# Altium PCB isg_eos_control_board_xem3001.PcbDoc
Units mil, origin at the board's own origin, x right, y up, seen from the top; angles counter-clockwise.
Board outline 9600 x 5000 mil, 4 copper layers (Top Layer, MidLayer 1, MidLayer 2, Bottom Layer), stack 23.756 mil thick; 133 components, 162 nets, 804 pads, 0 vias.
Unrouted connection lines stored in the file: 515.
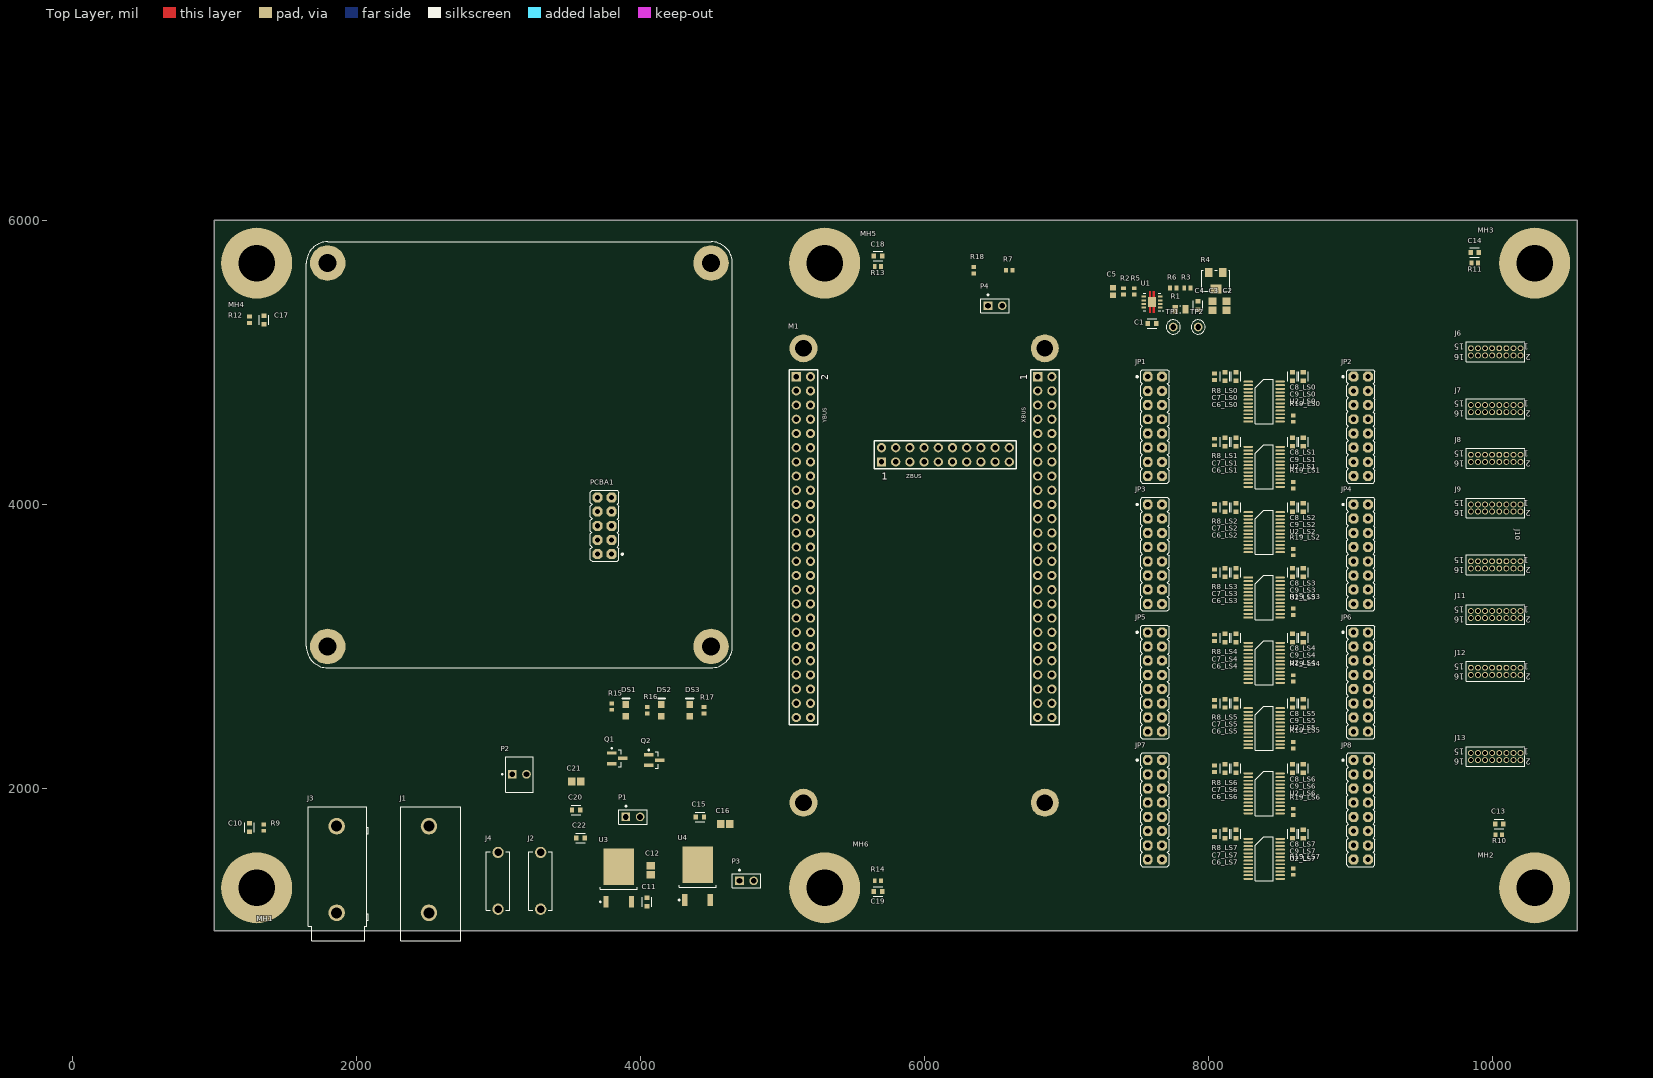
[diagram p0: Top Layer view]
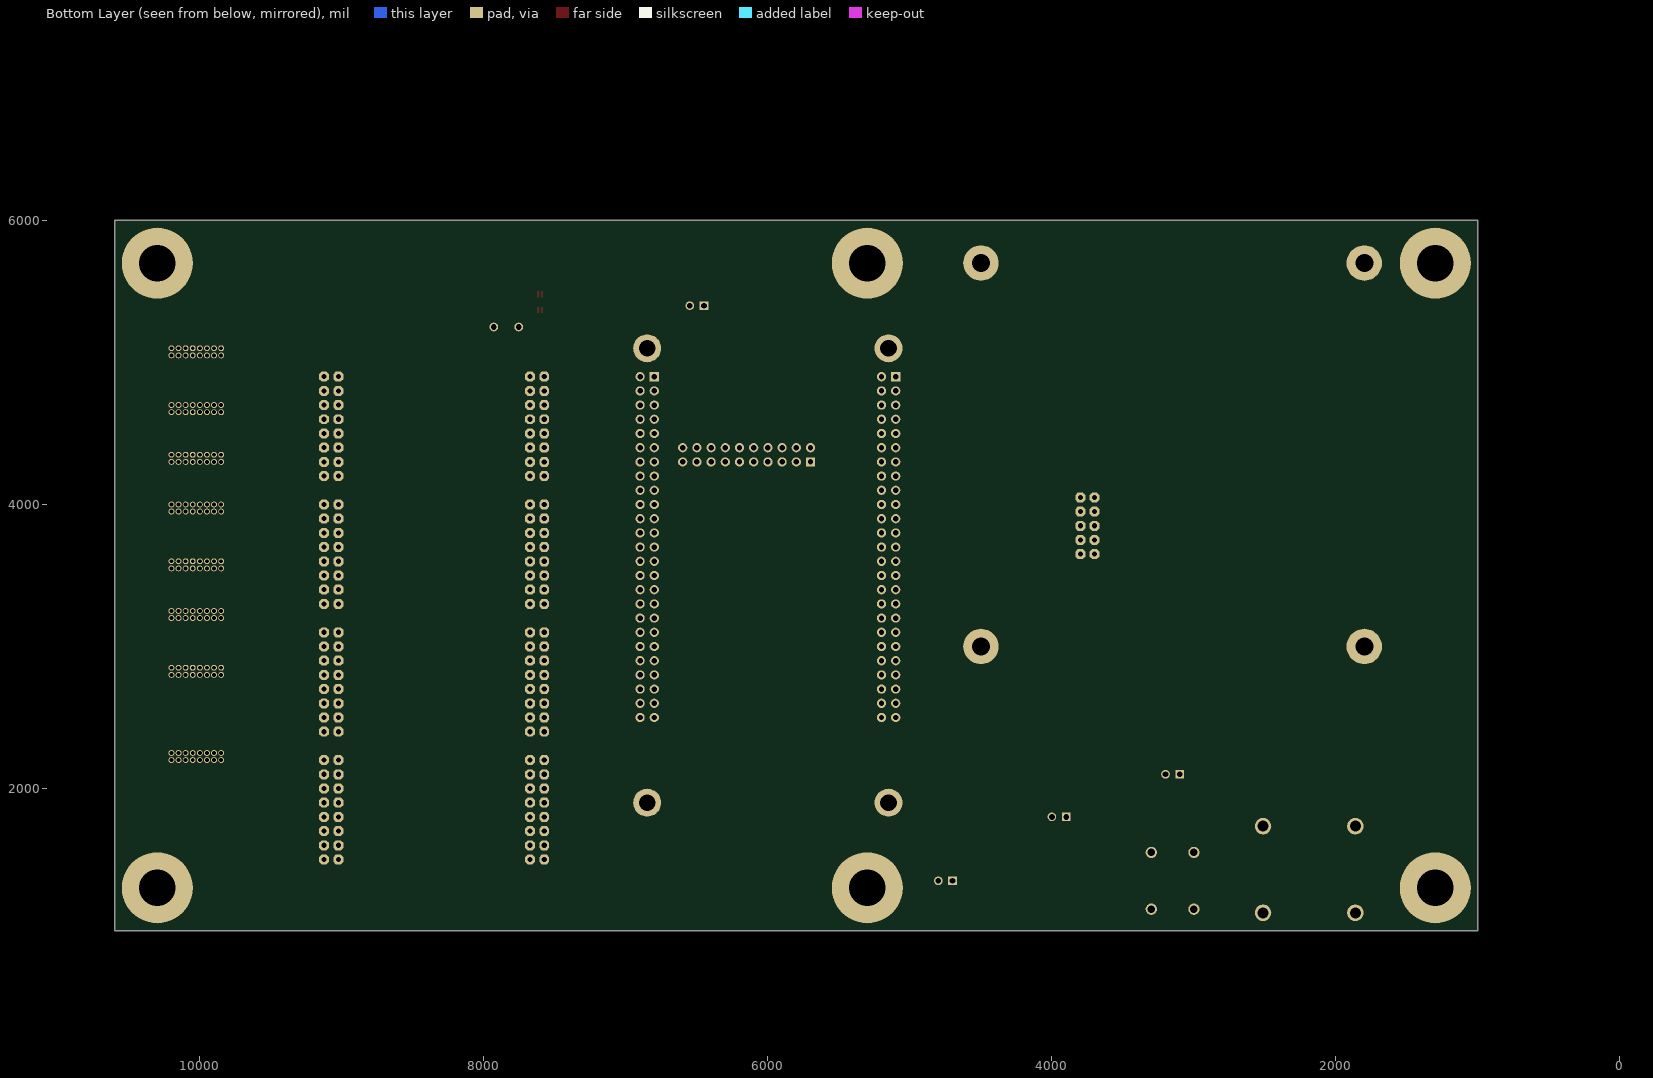
[diagram p1: Bottom Layer view, seen from below]
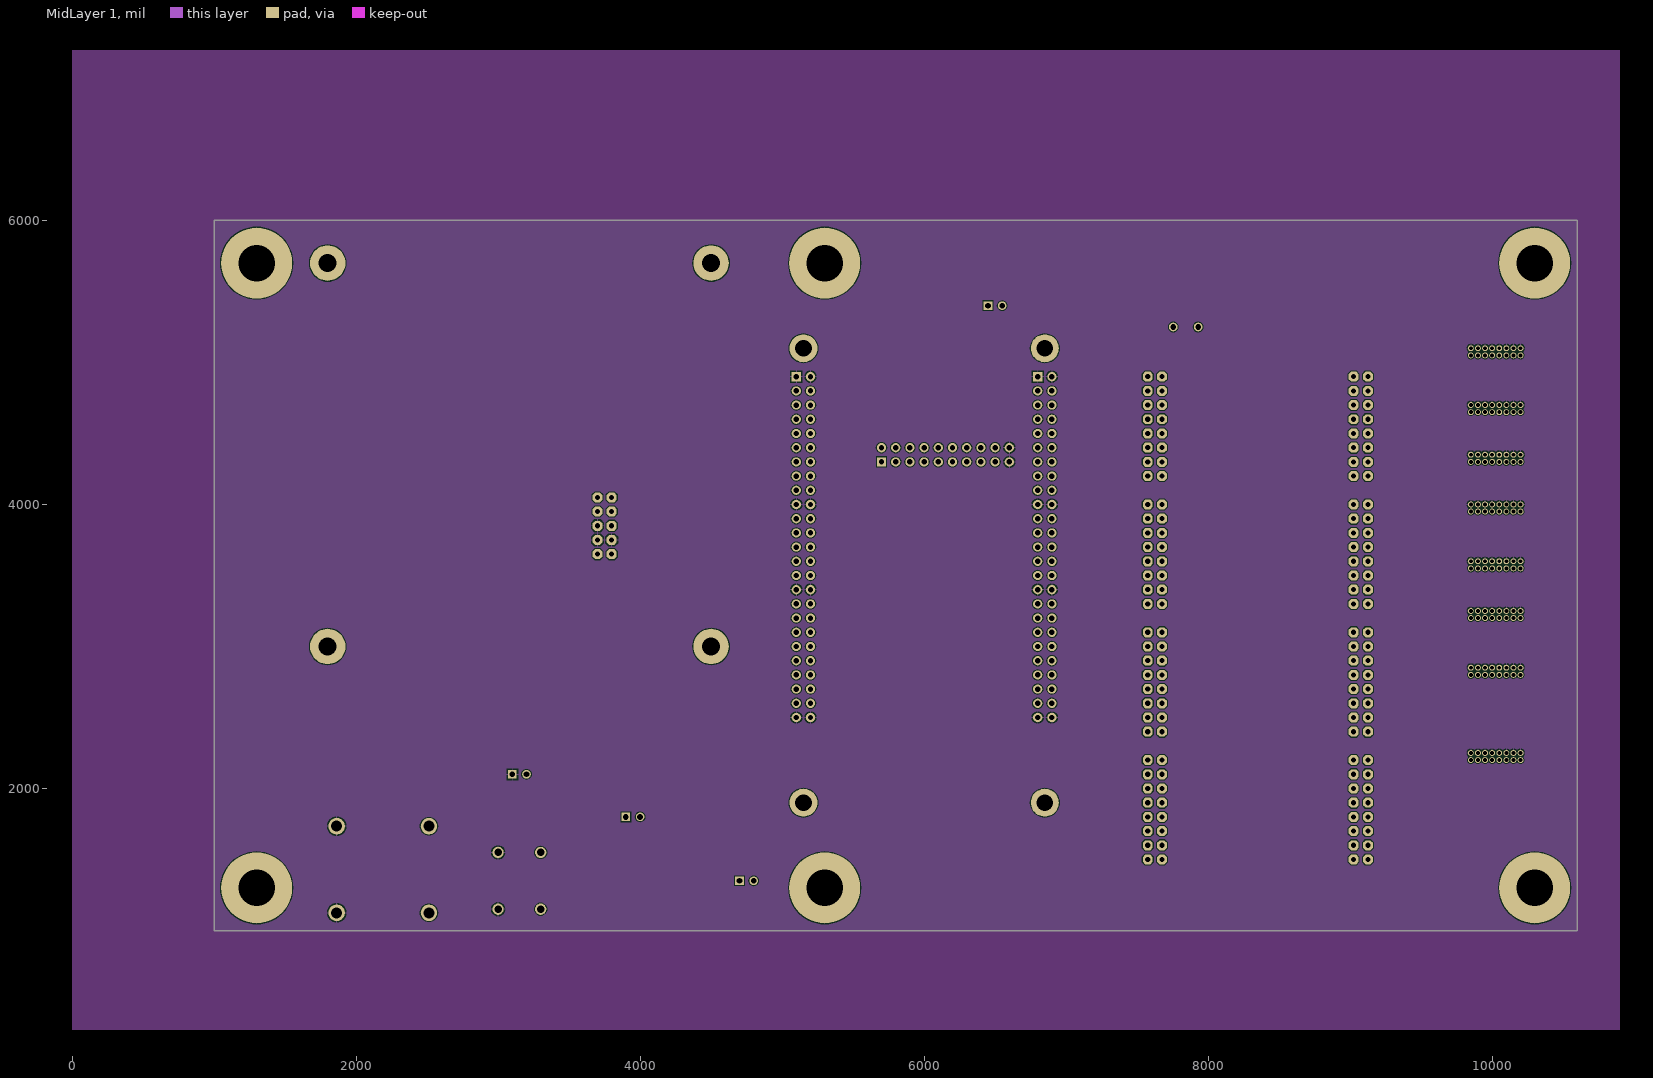
[diagram p2: MidLayer 1]

## Layer stack, top to bottom
Top Solder: solder mask 0.4, Solder Resist, Dk 3.5
Top Layer: signal copper 1.4
Dielectric 2: prepreg 2.8, PP-006, Dk 4.1
MidLayer 1: signal copper 1.3779
Dielectric 1: dielectric 12.6, FR-4, Dk 4.8
MidLayer 2: signal copper 1.3779
Dielectric 3: prepreg 2.8, PP-006, Dk 4.1
Bottom Layer: signal copper 1.4
Bottom Solder: solder mask 0.4, Solder Resist, Dk 3.5

## Board outline
1000,1000 10600,1000 10600,6000 1000,6000

## Design rules (kind name [scope] priority, off if disabled: settings)
Clearance [All] p1: gap=6 ignorepadtopadclearanceinfootprint=FALSE
PolygonConnect [All] p1: connectstyle=Relief reliefconductorwidth=10 reliefentries=4 polygonreliefangle="90 Angle" airgapwidth=10
RoomDefinition LS7 [InComponentClass('LS7')] p1: confinementstyle=ConfineIn formatcopy=TRUE lockcomponents=FALSE outline 8000,1315 8775,1315 8775,1775 8000,1775
RoomDefinition LS6 [InComponentClass('LS6')] p2: confinementstyle=ConfineIn formatcopy=TRUE lockcomponents=FALSE outline 8000,1775 8775,1775 8775,2235 8000,2235
RoomDefinition LS5 [InComponentClass('LS5')] p3: confinementstyle=ConfineIn formatcopy=TRUE lockcomponents=FALSE outline 8000,2235 8775,2235 8775,2695 8000,2695
RoomDefinition LS4 [InComponentClass('LS4')] p4: confinementstyle=ConfineIn formatcopy=TRUE lockcomponents=FALSE outline 8000,2695 8775,2695 8775,3155 8000,3155
RoomDefinition LS3 [InComponentClass('LS3')] p5: confinementstyle=ConfineIn formatcopy=TRUE lockcomponents=FALSE outline 8000,3155 8775,3155 8775,3615 8000,3615
RoomDefinition LS2 [InComponentClass('LS2')] p6: confinementstyle=ConfineIn formatcopy=TRUE lockcomponents=FALSE outline 8000,3615 8775,3615 8775,4075 8000,4075
RoomDefinition LS1 [InComponentClass('LS1')] p7: confinementstyle=ConfineIn formatcopy=TRUE lockcomponents=FALSE outline 8000,4075 8775,4075 8775,4535 8000,4535
RoomDefinition LS0 [InComponentClass('LS0')] p8: confinementstyle=ConfineIn formatcopy=TRUE lockcomponents=FALSE outline 8000,4535 8775,4535 8775,4995 8000,4995
RoomDefinition LDO_DVDD [InComponentClass('LDO_DVDD')] p9: confinementstyle=ConfineIn formatcopy=TRUE lockcomponents=FALSE outline 7279.53,5125 8179.53,5125 8179.53,5685 7279.53,5685
RoutingVias [All] p1: holewidth=28 width=50 viastyle="Through Hole" minholewidth=28 minwidth=50 maxholewidth=28 maxwidth=50
SolderMaskExpansion [All] p1: expansion=4
Width [All] p1: maxlimit=10 minlimit=10 preferedwidth=10
30 further rules are at their usual default settings.

## Classes and differential pairs
net class FPGA_IO_[65..0]: FPGA_IO_0 FPGA_IO_1 FPGA_IO_2 FPGA_IO_3 FPGA_IO_4 FPGA_IO_5 FPGA_IO_6 FPGA_IO_7 FPGA_IO_8 FPGA_IO_9 FPGA_IO_10 FPGA_IO_11 FPGA_IO_12 FPGA_IO_13 FPGA_IO_14 FPGA_IO_15 FPGA_IO_16 FPGA_IO_17 FPGA_IO_18 FPGA_IO_19 FPGA_IO_20 FPGA_IO_21 FPGA_IO_22 FPGA_IO_23 FPGA_IO_24 FPGA_IO_25 FPGA_IO_26 FPGA_IO_27 FPGA_IO_28 FPGA_IO_29 FPGA_IO_30 FPGA_IO_31 FPGA_IO_32 FPGA_IO_33 FPGA_IO_34 FPGA_IO_35 FPGA_IO_36 FPGA_IO_37 FPGA_IO_38 FPGA_IO_39 FPGA_IO_40 FPGA_IO_41 FPGA_IO_42 FPGA_IO_43 FPGA_IO_44 FPGA_IO_45 FPGA_IO_46 FPGA_IO_47 FPGA_IO_48 FPGA_IO_49 FPGA_IO_50 FPGA_IO_51 FPGA_IO_52 FPGA_IO_53 FPGA_IO_54 FPGA_IO_55 FPGA_IO_56 FPGA_IO_57 FPGA_IO_58 FPGA_IO_59 FPGA_IO_60 FPGA_IO_61 FPGA_IO_62 FPGA_IO_63 FPGA_IO_64 FPGA_IO_65
channel class subckt_level_shifter: LS0 LS1 LS2 LS3 LS4 LS5 LS6 LS7
component class LS7: C6_LS7 C7_LS7 C8_LS7 C9_LS7 R8_LS7 R19_LS7 U2_LS7
component class LS6: C6_LS6 C7_LS6 C8_LS6 C9_LS6 R8_LS6 R19_LS6 U2_LS6
component class LS5: C6_LS5 C7_LS5 C8_LS5 C9_LS5 R8_LS5 R19_LS5 U2_LS5
component class LS4: C6_LS4 C7_LS4 C8_LS4 C9_LS4 R8_LS4 R19_LS4 U2_LS4
component class LS3: C6_LS3 C7_LS3 C8_LS3 C9_LS3 R8_LS3 R19_LS3 U2_LS3
component class LS2: C6_LS2 C7_LS2 C8_LS2 C9_LS2 R8_LS2 R19_LS2 U2_LS2
component class LS1: C6_LS1 C7_LS1 C8_LS1 C9_LS1 R8_LS1 R19_LS1 U2_LS1
component class LS0: C6_LS0 C7_LS0 C8_LS0 C9_LS0 R8_LS0 R19_LS0 U2_LS0
component class LDO_DVDD: C1 C2 C3 C4 C5 R1 R2 R3 R4 R5 R6 TP1 TP2 U1
component class isg_eos_control_board_xem3001: C10 C11 C12 C13 C14 C15 C16 C17 C18 C19 C20 C21 C22 DS1 DS2 DS3 J1 J2 J3 J4 J6 J7 J8 J9 J10 J11 J12 J13 JP1 JP2 JP3 JP4 JP5 JP6 JP7 JP8 M1 M? MH1 MH2 MH3 MH4 MH5 MH6 P1 P2 P3 P4 PCBA1 Q1 Q2 R7 R9 R10 R11 R12 R13 R14 R15 R16 R17 R18 R? U3 U4

## Components (designator, comment, footprint, x,y, rotation, side; value= is the part's Value field where it differs from the comment)
C1 "CAP CER 100nF 0603 X7R" FP-CC0603-DA-MFG 7604.53,5275 r0 top value="100 nF"
C2 "CAP CER 4.7uF 0805 X7R" CAPC2013X140X50NL20T25 8129.53,5400 r90 top
C3 "CAP CER 4.7uF 0805 X7R" CAPC2013X140X50NL20T25 8029.53,5400 r90 top
C4 "CAP CER 100nF 0603 X7R" FP-CC0603-DA-MFG 7929.53,5400 r90 top value="100 nF"
C5 "CAP CER 10nF 0603 X7R" CAPC1608X90X40ML10T20 7329.53,5500 r90 top
C6_LS0 "CAP CER 100nF 0603 X7R" FP-CC0603-DA-MFG 8195,4900 r90 top value="100 nF" (schematic designator C6)
C6_LS1 "CAP CER 100nF 0603 X7R" FP-CC0603-DA-MFG 8195,4440 r90 top value="100 nF" (schematic designator C6)
C6_LS2 "CAP CER 100nF 0603 X7R" FP-CC0603-DA-MFG 8195,3980 r90 top value="100 nF" (schematic designator C6)
C6_LS3 "CAP CER 100nF 0603 X7R" FP-CC0603-DA-MFG 8195,3520 r90 top value="100 nF" (schematic designator C6)
C6_LS4 "CAP CER 100nF 0603 X7R" FP-CC0603-DA-MFG 8195,3060 r90 top value="100 nF" (schematic designator C6)
C6_LS5 "CAP CER 100nF 0603 X7R" FP-CC0603-DA-MFG 8195,2600 r90 top value="100 nF" (schematic designator C6)
C6_LS6 "CAP CER 100nF 0603 X7R" FP-CC0603-DA-MFG 8195,2140 r90 top value="100 nF" (schematic designator C6)
C6_LS7 "CAP CER 100nF 0603 X7R" FP-CC0603-DA-MFG 8195,1680 r90 top value="100 nF" (schematic designator C6)
C7_LS0 "CAP CER 10nF 0603 X7R" FP-CC0603-DA-MFG 8120,4900 r90 top value="100 nF" (schematic designator C7)
C7_LS1 "CAP CER 10nF 0603 X7R" FP-CC0603-DA-MFG 8120,4440 r90 top value="100 nF" (schematic designator C7)
C7_LS2 "CAP CER 10nF 0603 X7R" FP-CC0603-DA-MFG 8120,3980 r90 top value="100 nF" (schematic designator C7)
C7_LS3 "CAP CER 10nF 0603 X7R" FP-CC0603-DA-MFG 8120,3520 r90 top value="100 nF" (schematic designator C7)
C7_LS4 "CAP CER 10nF 0603 X7R" FP-CC0603-DA-MFG 8120,3060 r90 top value="100 nF" (schematic designator C7)
C7_LS5 "CAP CER 10nF 0603 X7R" FP-CC0603-DA-MFG 8120,2600 r90 top value="100 nF" (schematic designator C7)
C7_LS6 "CAP CER 10nF 0603 X7R" FP-CC0603-DA-MFG 8120,2140 r90 top value="100 nF" (schematic designator C7)
C7_LS7 "CAP CER 10nF 0603 X7R" FP-CC0603-DA-MFG 8120,1680 r90 top value="100 nF" (schematic designator C7)
C8_LS0 "CAP CER 100nF 0603 X7R" FP-CC0603-DA-MFG 8595,4900 r90 top value="100 nF" (schematic designator C8)
C8_LS1 "CAP CER 100nF 0603 X7R" FP-CC0603-DA-MFG 8595,4440 r90 top value="100 nF" (schematic designator C8)
C8_LS2 "CAP CER 100nF 0603 X7R" FP-CC0603-DA-MFG 8595,3980 r90 top value="100 nF" (schematic designator C8)
C8_LS3 "CAP CER 100nF 0603 X7R" FP-CC0603-DA-MFG 8595,3520 r90 top value="100 nF" (schematic designator C8)
C8_LS4 "CAP CER 100nF 0603 X7R" FP-CC0603-DA-MFG 8595,3060 r90 top value="100 nF" (schematic designator C8)
C8_LS5 "CAP CER 100nF 0603 X7R" FP-CC0603-DA-MFG 8595,2600 r90 top value="100 nF" (schematic designator C8)
C8_LS6 "CAP CER 100nF 0603 X7R" FP-CC0603-DA-MFG 8595,2140 r90 top value="100 nF" (schematic designator C8)
C8_LS7 "CAP CER 100nF 0603 X7R" FP-CC0603-DA-MFG 8595,1680 r90 top value="100 nF" (schematic designator C8)
C9_LS0 "CAP CER 10nF 0603 X7R" FP-CC0603-DA-MFG 8670,4900 r90 top value="100 nF" (schematic designator C9)
C9_LS1 "CAP CER 10nF 0603 X7R" FP-CC0603-DA-MFG 8670,4440 r90 top value="100 nF" (schematic designator C9)
C9_LS2 "CAP CER 10nF 0603 X7R" FP-CC0603-DA-MFG 8670,3980 r90 top value="100 nF" (schematic designator C9)
C9_LS3 "CAP CER 10nF 0603 X7R" FP-CC0603-DA-MFG 8670,3520 r90 top value="100 nF" (schematic designator C9)
C9_LS4 "CAP CER 10nF 0603 X7R" FP-CC0603-DA-MFG 8670,3060 r90 top value="100 nF" (schematic designator C9)
C9_LS5 "CAP CER 10nF 0603 X7R" FP-CC0603-DA-MFG 8670,2600 r90 top value="100 nF" (schematic designator C9)
C9_LS6 "CAP CER 10nF 0603 X7R" FP-CC0603-DA-MFG 8670,2140 r90 top value="100 nF" (schematic designator C9)
C9_LS7 "CAP CER 10nF 0603 X7R" FP-CC0603-DA-MFG 8670,1680 r90 top value="100 nF" (schematic designator C9)
C10 "DNP" FP-CC0603-DA-MFG 1250,1725 r90 top value="100 nF"
C11 "CAP CER 100nF 0603 10V X7R" FP-CC0603-DA-MFG 4050,1200 r90 top value="100 nF"
C12 "CAP CER 4.7uF 0805 10V X7R" CAPC2013X140X50NL20T25 4075,1425 r90 top
C13 "DNP" FP-CC0603-DA-MFG 10050,1750 r0 top value="100 nF"
C14 "DNP" FP-CC0603-DA-MFG 9877.36,5775 r0 top value="100 nF"
C15 "CAP CER 100nF 0603 10V X7R" FP-CC0603-DA-MFG 4420.47,1800 r0 top value="100 nF"
C16 "CAP CER 4.7uF 0805 10V X7R" CAPC2013X140X50NL20T25 4600,1750 r0 top
C17 "DNP" FP-CC0603-DA-MFG 1350,5300 r270 top value="100 nF"
C18 "DNP" FP-CC0603-DA-MFG 5675,5750 r0 top value="100 nF"
C19 "DNP" FP-CC0603-DA-MFG 5675,1275 r0 top value="100 nF"
C20 "CAP CER 100nF 0603 50V X7R" FP-CC0603-DA-MFG 3550,1850 r180 top value="100 nF"
C21 "CAP CER 4.7uF 0805 25V X7R" CAPC2013X140X50NL20T25 3550,2050 r180 top
C22 "CAP CER 100nF 0603 50V X7R" FP-CC0603-DA-MFG 3579.53,1650 r180 top value="100 nF"
DS1 "HSMG-C170" AVAG-HSMX-C170_V 3900,2550 r90 top
DS2 "HSMG-C170" AVAG-HSMX-C170_V 4150,2550 r90 top
DS3 "HSMG-C170" AVAG-HSMX-C170_V 4350,2550 r90 top
J1 "24.243.1" FP-24_243_1-MFG 2525,1400 r270 top
J2 "105-0752-001" FP-105-0751-001-MFG 3300,1350 r90 top
J3 "24.243.2" FP-24_243_2-MFG 1875,1400 r90 top
J4 "105-0753-001" FP-105-0751-001-MFG 3000,1350 r90 top
J6 "62201621121" 62201621121 10025,5075 r180 top
J7 "62201621121" 62201621121 10025,4675 r180 top
J8 "62201621121" 62201621121 10025,4325 r180 top
J9 "62201621121" 62201621121 10025,3975 r180 top
J10 "62201621121" 62201621121 10025,3575 r180 top
J11 "62201621121" 62201621121 10025,3225 r180 top
J12 "62201621121" 62201621121 10025,2825 r180 top
J13 "62201621121" 62201621121 10025,2225 r180 top
JP1 "PIN_HEADER_2X8" PIN_HEADER_2X8_2.54MM 7625,4550 r0 top
JP2 "PIN_HEADER_2X8" PIN_HEADER_2X8_2.54MM 9075,4550 r0 top
JP3 "PIN_HEADER_2X8" PIN_HEADER_2X8_2.54MM 7625,3650 r0 top
JP4 "PIN_HEADER_2X8" PIN_HEADER_2X8_2.54MM 9075,3650 r0 top
JP5 "PIN_HEADER_2X8" PIN_HEADER_2X8_2.54MM 7625,2750 r0 top
JP6 "PIN_HEADER_2X8" PIN_HEADER_2X8_2.54MM 9075,2750 r0 top
JP7 "PIN_HEADER_2X8" PIN_HEADER_2X8_2.54MM 7625,1850 r0 top
JP8 "PIN_HEADER_2X8" PIN_HEADER_2X8_2.54MM 9075,1850 r0 top
M1 "XEM3001" XEM3001MODULE 7000,1750 r90 top
MH1 "OPTICAL-MOUNT-HOLE-1/4-20" MH-1/4-20#1 1260,1520 r0 top
MH2 "OPTICAL-MOUNT-HOLE-1/4-20" MH-1/4-20#2 9400,1360 r0 top
MH3 "OPTICAL-MOUNT-HOLE-1/4-20" MH-1/4-20#3 9500,5200 r0 top
MH4 "OPTICAL-MOUNT-HOLE-1/4-20" MH-1/4-20#4 1100,5200 r0 top
MH5 "OPTICAL-MOUNT-HOLE-1/4-20" MH-1/4-20#5 5900,5700 r0 top
MH6 "OPTICAL-MOUNT-HOLE-1/4-20" MH-1/4-20#6 5750,1300 r0 top
P1 "TSW-102-07-S-S" SMTC-TSW-102-07-S-S 3950,1800 r0 top
P2 "22-23-2021" MOLX-22-23-2021_V 3150,2100 r0 top
P3 "TSW-102-07-S-S" SMTC-TSW-102-07-S-S 4750,1350 r0 top
P4 "TSW-102-07-S-S" SMTC-TSW-102-07-S-S 6500,5400 r0 top
PCBA1 "ISG-PLL-PCBA" ISG-PLL-PCBA 3150,4350 r180 top
Q1 "BSH105,215" NXP-SOT23_M 3839.37,2212.6 r0 top
Q2 "BSH105,215" NXP-SOT23_M 4100,2200 r0 top
R1 "RES SMD 1R 0805" RESC2013X50X30NL20T20 7804.53,5375 r0 top
R2 "RES SMD 0R 0603" RESC1609X50X30LL10T20 7404.53,5500 r90 top
R3 "DNP" RESC1609X50X30LL10T20 7854.53,5525 r0 top
R4 "3224W-1-103E" FP-3224W-MFG 8054.53,5575 r270 top value=10kO
R5 "DNP" RESC1609X50X30LL10T20 7479.53,5500 r270 top
R6 "DNP" RESC1609X50X30LL10T20 7754.53,5525 r0 top
R7 "RES SMD 10K OHMS 0603" RESC1609X50X30LL10T20 6600,5650 r0 top
R8_LS0 "RES SMD 330 OHMS 0603" RESC1609X50X30LL10T20 8045,4900 r90 top (schematic designator R8)
R8_LS1 "RES SMD 330 OHMS 0603" RESC1609X50X30LL10T20 8045,4440 r90 top (schematic designator R8)
R8_LS2 "RES SMD 330 OHMS 0603" RESC1609X50X30LL10T20 8045,3980 r90 top (schematic designator R8)
R8_LS3 "RES SMD 330 OHMS 0603" RESC1609X50X30LL10T20 8045,3520 r90 top (schematic designator R8)
R8_LS4 "RES SMD 330 OHMS 0603" RESC1609X50X30LL10T20 8045,3060 r90 top (schematic designator R8)
R8_LS5 "RES SMD 330 OHMS 0603" RESC1609X50X30LL10T20 8045,2600 r90 top (schematic designator R8)
R8_LS6 "RES SMD 330 OHMS 0603" RESC1609X50X30LL10T20 8045,2140 r90 top (schematic designator R8)
R8_LS7 "RES SMD 330 OHMS 0603" RESC1609X50X30LL10T20 8045,1680 r90 top (schematic designator R8)
R9 "DNP" RESC1609X50X30LL10T20 1350,1725 r90 top
R10 "DNP" RESC1609X50X30LL10T20 10047.64,1675 r0 top
R11 "DNP" RESC1609X50X30LL10T20 9877.36,5700 r0 top
R12 "DNP" RESC1609X50X30LL10T20 1250,5300 r270 top
R13 "DNP" RESC1609X50X30LL10T20 5675,5675 r0 top
R14 "DNP" RESC1609X50X30LL10T20 5675,1350 r0 top
R15 "RES SMD 100R 0603" RESC1609X50X30LL10T20 3800,2577.36 r90 top
R16 "RES SMD 62R 1% 0603" RESC1609X50X30LL10T20 4050,2550 r90 top
R17 "RES SMD 62R 1% 0603" RESC1609X50X30LL10T20 4450,2550 r90 top
R18 "RES SMD 100K OHMS 0603" RESC1609X50X30LL10T20 6350,5650 r90 top
R19_LS0 "DNP" RESC1609X50X30LL10T20 8600,4605 r90 top (schematic designator R19)
R19_LS1 "DNP" RESC1609X50X30LL10T20 8600,4135 r90 top (schematic designator R19)
R19_LS2 "DNP" RESC1609X50X30LL10T20 8600,3665 r90 top (schematic designator R19)
R19_LS3 "DNP" RESC1609X50X30LL10T20 8600,3245 r90 top (schematic designator R19)
R19_LS4 "DNP" RESC1609X50X30LL10T20 8600,2775 r90 top (schematic designator R19)
R19_LS5 "DNP" RESC1609X50X30LL10T20 8600,2305 r90 top (schematic designator R19)
R19_LS6 "DNP" RESC1609X50X30LL10T20 8600,1835 r90 top (schematic designator R19)
R19_LS7 "DNP" RESC1609X50X30LL10T20 8600,1415 r90 top (schematic designator R19)
TP1 "5002" KSTN-5002 7754.53,5250 r90 top
TP2 "5002" KSTN-5002 7929.53,5250 r0 top
U1 "TPS7A8001DRBT" DRB0008A_V 7604.53,5425 r180 top
U2_LS0 "SN74AVC8T245PW" PW0024A_N 8395,4725 r0 top (schematic designator U2)
U2_LS1 "SN74AVC8T245PW" PW0024A_N 8395,4265 r0 top (schematic designator U2)
U2_LS2 "SN74AVC8T245PW" PW0024A_N 8395,3805 r0 top (schematic designator U2)
U2_LS3 "SN74AVC8T245PW" PW0024A_N 8395,3345 r0 top (schematic designator U2)
U2_LS4 "SN74AVC8T245PW" PW0024A_N 8395,2885 r0 top (schematic designator U2)
U2_LS5 "SN74AVC8T245PW" PW0024A_N 8395,2425 r0 top (schematic designator U2)
U2_LS6 "SN74AVC8T245PW" PW0024A_N 8395,1965 r0 top (schematic designator U2)
U2_LS7 "SN74AVC8T245PW" PW0024A_N 8395,1505 r0 top (schematic designator U2)
U3 "LD1117DT50CTR" TO-252_N 3850,1369.29 r90 top
U4 "LD1117DT33TR" TO-252_N 4405.24,1382.32 r90 top

## Footprints (in the part's own frame and the unit in brackets; to place one, negate y for a bottom-side part, rotate by r counter-clockwise, add the part's x,y. Pads: shape width x height; smd on the part's side, far side on the other; paste and mask are expansions set on the pad)
62201621121 [mm] "Pin Header, pitch 1.27 mm, THT, Vertical, dual row, 16p"
  round 1.05 hole 0.7: 1(-4.445,-0.635) 2(-4.445,0.635) 3(-3.175,-0.635) 4(-3.175,0.635) 5(-1.905,-0.635) 6(-1.905,0.635) 7(-0.635,-0.635) 8(-0.635,0.635) 9(0.635,-0.635) 10(0.635,0.635) 11(1.905,-0.635) 12(1.905,0.635) 13(3.175,-0.635) 14(3.175,0.635) 15(4.445,-0.635) 16(4.445,0.635)
  silkscreen extent -5.23,-1.78 5.23,1.78, body extent -5.08,-1.7 5.08,1.7, height 5.33
AVAG-HSMX-C170_V [mm] "SMD, 2-Leads, Body 2x1.25mm, Height 0.8mm"
  rect 1.2x1.2 smd: 1(-1.05,0) 2(1.05,0)
  silkscreen extent 2.15,-0.63 2.15,0.63, body extent -1,-0.63 1,0.63, height 0.8
CAPC1608X90X40ML10T20 [mm] "Chip Capacitor, 2-Leads, Body 1.7x0.9mm, IPC Low Density"
  rect 1.05x1.05 smd: 1(-0.675,0) 2(0.675,0)
  body extent -0.85,-0.45 0.85,0.45, height 0.9
CAPC2013X140X50NL20T25 [mm] "Chip Capacitor, 2-Leads, Body 2.00x1.25mm, IPC Medium Density"
  rect 1.3x1.45 smd: 1(-0.8,0) 2(0.8,0)
  body extent -1.1,-0.72 1.1,0.72, height 1.4
DRB0008A_V [mm] "SON, 8-Leads, Body 3x3mm, Pitch 0.65mm, Thermal Pad 1.50 x 3.8mm"
  rrect29% 0.85x0.35 smd: 1(-1.475,0.975) 2(-1.475,0.325) 3(-1.475,-0.325) 4(-1.475,-0.975) 5(1.475,-0.975) 6(1.475,-0.325) 7(1.475,0.325) 8(1.475,0.975)
  rrect7% 1.5x1.75 smd: 9(0,0)
  Top Layer region: 0.185,0.875 0.185,1.9 0.465,1.9 0.465,0.875
  Top Layer region: -0.185,-0.875 -0.185,-1.9 -0.465,-1.9 -0.465,-0.875
  Top Layer region: 0.185,-0.875 0.185,-1.9 0.465,-1.9 0.465,-0.875
  Top Layer region: -0.185,0.875 -0.185,1.9 -0.465,1.9 -0.465,0.875
  silkscreen extent -2.02,-1.58 1.57,1.62, body extent -1.5,-1.5 1.5,1.5, height 1
FP-24_243_1-MFG [mm]
  round 2.95 hole 1.95 paste-1000 mask+0: 1(-8.5,-0.3) 1(7,-0.3)
  silkscreen extent -12,-5.35 12,5.35, body extent -12.1,-5.45 12.1,5.45, height 0.25
FP-24_243_2-MFG [mm]
  round 2.95 hole 1.95 paste-1000 mask+0: 1(-7,0.3) 1(8.5,0.3)
  silkscreen extent -12,-5.35 12,5.35, body extent -12.1,-5.45 12.1,5.45, height 0.25
FP-105-0751-001-MFG [mil]
  round 79.56 hole 52 paste-39370.1 mask+0: 1(-200,0) 1(200,0)
  silkscreen extent -206,-83 206,83, body extent -244,-87 244,87, height 10
FP-3224W-MFG [mm]
  rect 1.6x1.3 smd paste+0 mask+0: 1(-1.45,1.25) 3(-1.45,-1.25)
  rect 1.6x2 smd paste+0 mask+0: 2(1.45,0)
  silkscreen extent -1.88,-2.52 1.88,2.52, body extent -2.35,-2.63 2.35,2.63, height 0.25
FP-CC0603-DA-MFG [mm]
  rect 0.8x0.9 smd paste+0 mask+0: 1(-0.75,0) 2(0.75,0)
  silkscreen extent -0.85,-0.85 0.85,0.85, body extent -1.35,-0.75 1.35,0.75, height 0.25
ISG-PLL-PCBA [mil]
  oct 70x70 hole 36: 1(-650,700) 2(-550,700) 3(-650,600) 4(-550,600) 5(-650,500) 6(-550,500) 7(-650,400) 8(-550,400) 9(-650,300) 10(-550,300)
  round 250 hole 125.98: MH1(-1350,-1350) MH2(1350,-1350) MH3(1350,1350) MH4(-1350,1350)
  silkscreen extent -1500,-1500 1500,1500
KSTN-5002 [mm] "Test Point, Through Hole, Dia 2.54mm"
  round 1.55 hole 1.016: 1(0,0)
  silkscreen extent -1.27,-1.27 1.27,1.27, body extent -1.25,-1.25 1.25,1.25, height 4.62
MH-1/4-20#1 [mil]
  round 500 hole 257: PAD(40,-220)
MH-1/4-20#2 [mil]
  round 500 hole 257: PAD(900,-60)
MH-1/4-20#3 [mil]
  round 500 hole 257: PAD(800,500)
MH-1/4-20#4 [mil]
  round 500 hole 257: PAD(200,500)
MH-1/4-20#5 [mil]
  round 500 hole 257: PAD(-600,0)
MH-1/4-20#6 [mil]
  round 500 hole 257: PAD(-450,0)
MOLX-22-23-2021_V [mm] "THD, 2-Leads, Body 6.35x4.93mm, Pitch 2.54mm"
  rect 1.55x1.55 hole 1.02: 1(-1.27,0)
  round 1.55 hole 1.02: 2(1.27,0)
  silkscreen extent -3.19,-3.25 2.46,3.1, body extent -2.46,-3.25 2.46,3.1, height 10.66
NXP-SOT23_M [mm] "SOT23, 3-Leads, Body 3x1.4mm, Pitch 0.95mm, IPC Low Density"
  rect 1.7x0.6 smd: 1(-1,0.95) 2(-1,-0.95) 3(1,0)
  silkscreen extent -1.12,-1.5 0.7,1.92, body extent -0.7,-1.5 0.7,1.5, height 1.1
PIN_HEADER_2X8_2.54MM [mil]
  oct 70x70 hole 36: 1(-50,350) 2(50,350) 3(-50,250) 4(50,250) 5(-50,150) 6(50,150) 7(-50,50) 8(50,50) 9(-50,-50) 10(50,-50) 11(-50,-150) 12(50,-150) 13(-50,-250) 14(50,-250) 15(-50,-350) 16(50,-350)
  silkscreen extent -131,-400 100,400
PW0024A_N [mm]
  oval 1.7x0.35 smd: 1(-2.85,3.575) 2(-2.85,2.925) 3(-2.85,2.275) 4(-2.85,1.625) 5(-2.85,0.975) 6(-2.85,0.325) 7(-2.85,-0.325) 8(-2.85,-0.975) 9(-2.85,-1.625) 10(-2.85,-2.275) 11(-2.85,-2.925) 12(-2.85,-3.575) 13(2.85,-3.575) 14(2.85,-2.925) 15(2.85,-2.275) 16(2.85,-1.625) 17(2.85,-0.975) 18(2.85,-0.325) 19(2.85,0.325) 20(2.85,0.975) 21(2.85,1.625) 22(2.85,2.275) 23(2.85,2.925) 24(2.85,3.575)
  silkscreen extent -1.6,-3.95 1.6,3.95, body extent -3.21,-3.9 3.21,3.9, height 0.98
RESC1609X50X30LL10T20 [mm] "Chip Resistor, 2-Leads, Body 1.55x0.85mm, IPC High Density"
  rect 0.7x0.85 smd: 1(-0.575,0) 2(0.575,0)
  body extent -0.82,-0.48 0.82,0.48, height 0.5
RESC2013X50X30NL20T20 [mm] "Chip Resistor, 2-Leads, Body 2.00x1.25mm, IPC Medium Density"
  rect 1.05x1.45 smd: 1(-0.925,0) 2(0.925,0)
  silkscreen extent -0.1,-0.63 0.1,0.63, body extent -1.1,-0.72 1.1,0.72, height 0.5
SMTC-TSW-102-07-S-S [mm] "Header, 2-Leads, Body 5.08x2.54mm, Pitch 2.54mm"
  rect 1.55x1.55 hole 1.02: 1(-1.27,0)
  round 1.55 hole 1.02: 2(1.27,0)
  silkscreen extent -2.54,-1.27 2.54,2.04, body extent -2.54,-1.27 2.67,1.27, height 8.38
TO-252_N [mm] "D-PAK, 4-Leads, Body 6.1x6.5mm, Pitch 2.28mm, Lead Span 9.7mm, IPC Medium Density"
  rect 2.1x0.95 smd: 1(-4.25,2.28) 3(-4.25,-2.28)
  rect 6.5x5.5 smd: 4(2.05,0)
  silkscreen extent -4.37,-3.3 -1.6,3.43, body extent -2,-3.3 4.2,3.3, height 2.4
XEM3001MODULE [mil]
  round 196.85 hole 118.11: 0(150,1850) 0(150,150) 0(3350,150) 0(3350,1850)
  rect 65x65 hole 38: X1(3150,200) Y1(3150,1900) Z1(2550,1300)
  round 65 hole 38: X2(3150,100) X3(3050,200) X4(3050,100) X5(2950,200) X6(2950,100) X7(2850,200) X8(2850,100) X9(2750,200) X10(2750,100) X11(2650,200) X12(2650,100) X13(2550,200) X14(2550,100) X15(2450,200) X16(2450,100) X17(2350,200) X18(2350,100) X19(2250,200) X20(2250,100) X21(2150,200) X22(2150,100) X23(2050,200) X24(2050,100) X25(1950,200) X26(1950,100) X27(1850,200) X28(1850,100) X29(1750,200) X30(1750,100) X31(1650,200) X32(1650,100) X33(1550,200) X34(1550,100) X35(1450,200) X36(1450,100) X37(1350,200) X38(1350,100) X39(1250,200) X40(1250,100) X41(1150,200) X42(1150,100) X43(1050,200) X44(1050,100) X45(950,200) X46(950,100) X47(850,200) X48(850,100) X49(750,200) X50(750,100) Y2(3150,1800) Y3(3050,1900) Y4(3050,1800) Y5(2950,1900) Y6(2950,1800) Y7(2850,1900) Y8(2850,1800) Y9(2750,1900) Y10(2750,1800) Y11(2650,1900) Y12(2650,1800) Y13(2550,1900) Y14(2550,1800) Y15(2450,1900) Y16(2450,1800) Y17(2350,1900) Y18(2350,1800) Y19(2250,1900) Y20(2250,1800) Y21(2150,1900) Y22(2150,1800) Y23(2050,1900) Y24(2050,1800) Y25(1950,1900) Y26(1950,1800) Y27(1850,1900) Y28(1850,1800) Y29(1750,1900) Y30(1750,1800) Y31(1650,1900) Y32(1650,1800) Y33(1550,1900) Y34(1550,1800) Y35(1450,1900) Y36(1450,1800) Y37(1350,1900) Y38(1350,1800) Y39(1250,1900) Y40(1250,1800) Y41(1150,1900) Y42(1150,1800) Y43(1050,1900) Y44(1050,1800) Y45(950,1900) Y46(950,1800) Y47(850,1900) Y48(850,1800) Y49(750,1900) Y50(750,1800) Z2(2650,1300) Z3(2550,1200) Z4(2650,1200) Z5(2550,1100) Z6(2650,1100) Z7(2550,1000) Z8(2650,1000) Z9(2550,900) Z10(2650,900) Z11(2550,800) Z12(2650,800) Z13(2550,700) Z14(2650,700) Z15(2550,600) Z16(2650,600) Z17(2550,500) Z18(2650,500) Z19(2550,400) Z20(2650,400)
  silkscreen extent 700,50 3200,1950

## Part data
C1 C4 C6_LS0 C6_LS1 C6_LS2 C6_LS3 C6_LS4 C6_LS5 C6_LS6 C6_LS7 C7_LS0 C7_LS1 C7_LS2 C7_LS3 C7_LS4 C7_LS5 C7_LS6 C7_LS7 C8_LS0 C8_LS1 C8_LS2 C8_LS3 C8_LS4 C8_LS5 C8_LS6 C8_LS7 C9_LS0 C9_LS1 C9_LS2 C9_LS3 C9_LS4 C9_LS5 C9_LS6 C9_LS7 C10 C11 C13 C14 C15 C17 C18 C19 C20 C22: library part CMP-03422-000030-1, "CAP CER 0.1UF 16V X7R 0603", Capacitance="100 nF", Manufacturer=YAGEO, Manufacturer Part Number=CC0603KRX7R7BB104, Package=CC0603-DA, Temperature="-55°C to +125°C", Temperature Characteristic=X7R, Temperature Coefficient=15%, Temperature Range High=+125°C, Temperature Range Low=-55°C, Tolerance=0.1, Voltage="16 V", Automotive=No, Category=Cap, ComponentLink2Description=Datasheet, ComponentLink2URL=http://www.yageo.com/documents/recent/UPY-GPHC_X7R_6.3V-to-50V_18.pdf, Device Class L1="Passive Components", Device Class L2=Capacitors, Device Class L3="Ceramic Capacitors", Digikey Description="CAP CER 0.1UF 16V X7R 0603", Footprint Url=http://www.yageo.com/exep/pages/download/literatures/UPY-C_GEN_24.pdf, Height=0.9mm, Lead Free=Yes, Material=Ceramic, Mouser Description="Multilayer Ceramic Capacitor, CC Series, 0.1 - F, - 10%, X7R, 16 V, 0603 [1608 Metric]", Octopart=https://octopart.com/cc0603krx7r7bb104-yageo-192941, RoHS=TRUE, Voltage Rating="16 V"
C2 C3 C12 C16 C21: library part CMP-2007-04677-1, Manufacturer="AVX Interconnect / Elco", Part Number=0805ZC475KAT2A
C5: library part CMP-2100-03600-1, "Chip Capacitor, 10 nF, +/- 10%, 50 V, -55 to 125 degC, 0603 (1608 Metric), RoHS, Tape and Reel", Capacitance=10nF, Case/Package=0603, Case Code (Metric)=1608, Dielectric=X7R, Insulation Resistance=100GR, Manufacturer=Yageo, Max Operating Temperature=125degC, Min Operating Temperature=-55degC, Package Description="2-Pin Surface Mount Device, Body 1.6 x 0.8 mm", Package Quantity=1, Tolerance=10%, Voltage=50V, Case Code (Imperial)=0603, Composition=Ceramic, Datasheet URL=http://www.yageo.com/documents/recent/UPY-GPHC_X7R_6.3V-to-50V_15.pdf, Datasheet Version="Rev. 15, 10/2016", Depth=0.8mm, Height=0.8mm, Lead Free=LeadFree, Length=1.6mm, Manufacturer URL=http://www.yageo.com/, Material=Ceramic, Mount=SurfaceMount, Number of Pins=2, Package Reference=0603, Packaging=TapeandReel, Radiation Hardening=No, REACH SVHC=NoSVHC, RoHSCompliant=True, Termination=SMD/SMT, Thickness=0.035inch, Voltage Rating=50V, Voltage Rating (DC)=50V, Width=0.031inch
DS1 DS2 DS3: library part CMP-2000-05062-1, "Chip LED, Green, 2.2 V, -40 to 85 degC, 2-Pin SMD, Pb-Free, Tape and Reel", Forward Current If=20mA, Forward Voltage=2.2V, Forward Voltage VF Max=2.6V, LED Colour=Green, Manufacturer=Avago, Operating Temperature Max=85degC, Operating Temperature Min=-30degC, Operating Temperature Range=-30degCto+85degC, Opto Case Style=SMD, Package Description="2-Pin Surface Mount Device, Body 2 x 1.25 mm, Height 0.8 mm", Package Reference=HSMX-C170, Storage Temperature Min=-40degC, Bulb Size=1.25mmx1.4mm, Datasheet URL=https://datasheet.ciiva.com/29280/180495-da-01-en-chip-led-hsmg-c170-gelb-gruen-29280971.pdf, Datasheet Version=Oct-08, Dominant Wavelength=572nm, Dominant Wavelength Typ=572nm, External Depth=0.8mm, External Length / Height=2mm, External Width=1.25mm, Forward Current If Max=20mA, LED Mounting=SMD, LED Type=Standard, Lens Shape=Rectangular, Light Area Height=1mm, Luminous Intensity=15mcd, Luminous Intensity Min=4mcd, Luminous Intensity Typ=15mcd, Manufacturer URL=http://www.avagotech.com/, Mounting Type=SMD, MSL=MSL2A-4weeks, No. of Pins=2, Opto Mounting Orientation=Top, Packaging=CutTape, Peak Forward Current=20mA, Peak Wavelength=570nm, PIV Max=5V, Storage Temperature Max=85degC, SVHC=NoSVHC(16-Jun-2014), Viewing Angle=170deg, Voltage Vf Typ=2.2V, Wavelength Typ=570nm
J1: library part CMP-12400-000001-1, "RECEPTACLE, 20A, 4MM, PCB, SOLDER, RED", Current Rating=24A, Manufacturer=Multicomp, Voltage Rating=60V, Automotive=No, Category=Conn, ComponentLink2Description=Datasheet, ComponentLink2URL=https://datasheet.octopart.com/24.243.1-Multicomp-datasheet-38887736.pdf, Conn Orientation=Horizontal, Contact Material=Silver, Device Class L1=Connectors, Device Class L2=unset, Device Class L3=unset, Height=13mm, Is Female=yes, Lead Free=Yes, Manufacturer Part Number=24.243.1, Number Of Contacts=1, Octopart=https://octopart.com/24.243.1-multicomp-57101049, Package=24.243.1, RoHS=TRUE
J2 J4: library part CMP-09586-000001-1, "CONN TIP JACK SOLDER WHITE", Current Rating=5A, Manufacturer="Cinch Connectivity", Manufacturer Part Number=105-0751-001, Temperature="-55°C to +75°C", Temperature Range High=+75°C, Temperature Range Low=-55°C, Voltage Rating=1500V, Automotive=No, Category=Conn, ComponentLink2Description=Datasheet, ComponentLink2URL=https://belfuse.com/resources/Johnson/drawings/dr-1050751001.pdf, Conn Orientation=Horizontal, Contact Material=Silver, Device Class L1=Connectors, Device Class L2=unset, Device Class L3=unset, Digikey Description="CONN TIP JACK SOLDER WHITE", Height=0.213inch, Is Female=yes, Lead Free=Yes, Number Of Contacts=1, Octopart=https://octopart.com/105-0751-001-cinch+connectivity+solutions-51372833, Package=105-0751-001, Pitch=10.16mm, RoHS=TRUE
J3: library part CMP-12400-000002-1, "RECEPTACLE, 20A, 4MM, PCB, SOLDER, BLACK", Current Rating=24A, Manufacturer=Multicomp, Voltage Rating=60V, Automotive=No, Category=Conn, ComponentLink2Description=Datasheet, ComponentLink2URL=https://datasheet.octopart.com/24.243.2-Multicomp-datasheet-38887736.pdf, Conn Orientation=Horizontal, Contact Material=Silver, Device Class L1=Connectors, Device Class L2=unset, Device Class L3=unset, Height=13mm, Is Female=yes, Lead Free=Yes, Manufacturer Part Number=24.243.2, Number Of Contacts=1, Octopart=https://octopart.com/24.243.2-multicomp-57101050, Package=24.243.2, RoHS=TRUE
J6 J7 J8 J9 J10 J11 J12 J13: library part CMP-1502-00950-1, "THT Vertical Pin Header WR-PHD, Pitch 1.27 mm, Dual Row, 16 pins", Contact Resistance=20mOhm, Manufacturer="Wurth Elektronik", Operating Temperature=-40to105degC, Rated Current=1A, Withstanding Voltage=500VAC, Working Voltage=100VAC, Datasheet URL=https://katalog.we-online.de/em/datasheet/62201621121.pdf, Gender=Male, Manufacturer URL=http://www.we-online.de, Mounting Technology=THT, Orientation=Vertical, Package Reference=62201621121, Packaging=Box, Part Number=62201621121, Pin Number=16, Pitch=1.27mm, Publisher=WurthElektronik, Row Number=Dual
M1: "XEM3001 Module Connector", Manufacturer="Generic Components", Class I=Connector, Publisher="Opal Kelly", Revision=20040624
P1 P3 P4: library part CMP-1681-00004-4, "Male Header, Pitch 2.54 mm, 1 x 2 Position, Height 8.38 mm, Tail Length 2.54 mm, -55 to 125 degC, RoHS, Bulk", Colour=Black, Manufacturer=Samtec, Max Operating Temperature="125 degC", Min Operating Temperature="-55 degC", Package Quantity=1, ComponentLink1Description="Manufacturer URL", ComponentLink1URL=http://www.samtec.com/, ComponentLink2Description=Datasheet, ComponentLink2URL=http://suddendocs.samtec.com/catalog_english/tsw_th.pdf, Contact Finish=Gold, Contact Material=Bronze, Contact Plating=Gold, DatasheetVersion=12/2015, Height="8.38 mm", Lead Pitch="0.1 inch", Length="5.08 mm", Mount="Through Hole", Mounting Technology="Through Hole", PackageDescription="Male Header, Pitch 2.54 mm, 1 x 2 Position, Height 8.38 mm, Tail Length 2.54 mm", PackageReference=TSW-102-07-S-S, Packaging=Bulk, Pins=2, REACH SVHC="No SVHC", RoHSCompliant=true, Rows=1
P2: library part CMP-1704-00001-3, "Male Header, Pitch 2.54 mm, 1 x 2 Position, Height 10.67 mm, Tail Length 3.56 mm, 0 to 75 degC, RoHS, Bulk", Max Operating Temperature="75 degC", Min Operating Temperature="0 degC", Package Quantity=3000, ComponentLink1Description="Manufacturer URL", ComponentLink1URL=http://www.molex.com/, ComponentLink2Description=Datasheet, ComponentLink2URL=https://datasheet.ciiva.com/19454/232266-19454304.pdf, Height="10.67 mm", Length="5.08 mm", Mount="Through Hole", Mounting Technology="Through Hole", PackageDescription="Male Header, Pitch 2.54 mm, 1 x 2 Position, Height 10.67 mm, Tail Length 3.56 mm", Packaging=Bulk, PartNumber=22-23-2021, Pins=2, Radiation Hardening=No, REACH SVHC=Unknown, RoHSCompliant=True, Width="6.35 mm"
Q1 Q2: library part CMP-1258-00134-1, "N-Channel Enhancement Mode MOS Transistor, 20 V, 1.05 A, -55 to 150 degC, 3-Pin SOT23, Tape and Reel", Manufacturer="NXP Semiconductors", Channel Type=N, Ciss [typ] (pF)=152, Code_JEDEC=TO-236AB, ComponentLink1Description="Manufacturer URL", ComponentLink1URL=http://www.nxp.com/, ComponentLink2Description=Datasheet, ComponentLink2URL=http://www.nxp.com/documents/data_sheet/BSH105.pdf, ComponentLink3Description="Package Specification", ComponentLink3URL=http://www.nxp.com/documents/outline_drawing/sot023_po.pdf, Coss [typ] (pF)=71, DatasheetVersion="Rev. 1.000", ID [max] (A)=1.05, Mounting Technology="Surface Mount", PackageDescription="3-Pin Small Outline Transistor Package, Body 2.9 x 1.3 mm, Pitch 0.95 mm", PackageReference=SOT23, PackageVersion="06-03-16, 03/2006", Packing="Tape & Reel", PartNumber=BSH105,215, Qr [typ] (nC)=19, VDS [max] (V)=20, VGSth [typ] (V)=0.57
R1: library part CMP-2001-04897-1, Manufacturer="Vishay Dale", Part Number=CRCW08050000Z0EB
R2 R7 R8_LS0 R8_LS1 R8_LS2 R8_LS3 R8_LS4 R8_LS5 R8_LS6 R8_LS7 R15 R16 R17 R18: library part CMP-2000-03820-1, "DNP", Manufacturer="Vishay Dale", Part Number=CRCW0603100KFKEA
R3 R5 R6 R9 R10 R11 R12 R13 R14 R19_LS0 R19_LS1 R19_LS2 R19_LS3 R19_LS4 R19_LS5 R19_LS6 R19_LS7: library part CMP-2000-03820-1, Manufacturer="Vishay Dale", Part Number=CRCW0603100KFKEA
R4: library part CMP-07234-000002-1, "TRIMMER 10K OHM 0.25W J LEAD TOP", Manufacturer=Bourns, Package=3224W, Power Rating=250mW, Resistance=10kO, Temperature="-65°C to +150°C", Temperature Coefficient=100ppm/°C, Temperature Range High=+150°C, Temperature Range Low=-65°C, Tolerance=10%, Voltage Rating=300V, Automotive=No, Category=Res, ComponentLink2Description=Datasheet, ComponentLink2URL=https://upverter.com/datasheet/a166fca85da25564670351d2dc712345c058bc40.pdf, Composition=Cermet, Device Class L1="Passive Components", Device Class L2=Resistors, Device Class L3="Variable Resistors and Potentiometers", Digikey Description="TRIMMER 10K OHM 0.25W J LEAD TOP", Height=5.55mm, Lead Free=Yes, Manufacturer Part Number=3224W-1-103E, Mouser Description="Trimmer Resistors - SMD 4mm 10Kohms 10% Square Cermet Sealed", Octopart=https://octopart.com/3224w-1-103e-bourns-14818, RoHS=TRUE, Series=3224, Standoff Height=0.2mm
TP1 TP2: library part CMP-2000-05182-1, "Test Point, White, 1-Pin THD, RoHS, Bulk", Color=White, Manufacturer=KeystoneElectronics, Brand=KeystoneElectronics, Contact Material=PhosphorBronze, Datasheet URL=https://ciiva.com/datasheet-click-2917627?src=ciiva&sig=bd195616, Datasheet Version="Rev. G, 12/2008", Length=7.62mm, Manufacturer URL=http://www.keyelco.com/, Material=Nylon, Mounting Hole Size=1mm, Outside Diameter=2.54mm, Packaging=Bulk, Plating=Silver, Product=TestPoints, Product Category=CircuitBoardHardware-PCB, RoHS=True, Type=Miniature
U1: library part CMP-0395-00597-2, "Single Output LDO, 1 A, Adjustable 0.8 to 6 V Output, 2.2 to 6.5 V Input, with High-Bandwidth PSRR, 8-pin SON (DRB), -40 to 125 degC, Green (RoHS & no Sb/Br)", Manufacturer="Texas Instruments", Accuracy(%)=3, ComponentLink1Description="Manufacturer URL", ComponentLink1URL=http://www.ti.com/, ComponentLink2Description=Datasheet, ComponentLink2URL=http://www.ti.com/general/docs/lit/getliterature.tsp?genericPartNumber=TPS7A8001&fileType=pdf, ComponentLink3Description="Package Specification", ComponentLink3URL=http://www.ti.com/litv/pdf/mpds118h, DatasheetVersion=SBVS135G, Eco-Plan="Green (RoHS & no Sb/Br)", Iout(Max)(A)=1, Iq(Typ)(mA)=0.04, Mounting Technology="Surface Mount", PackageDescription="8-Pin Plastic Small Outline, Body 3 x 3 mm, Pitch 0.65 mm", PackageReference=DRB0008A, PackageVersion=4203482-2/K, PartNumber=TPS7A8001DRBT, SubFamily="Single Channel LDO", Vdo(Typ)(mV)=170, Vin(Max)(V)=6.5, Vin(Min)(V)=2.2, Vout Adj(Max)(V)=6, Vout Adj(Min)(V)=0.8
U2_LS0 U2_LS1 U2_LS2 U2_LS3 U2_LS4 U2_LS5 U2_LS6 U2_LS7: "8-BIT DUAL-SUPPLY BUS TRANSCEIVER WITH CONFIGURABLE VOLTAGE TRANSLATION AND 3-STATE OUTPUTS, PW0024A", Alternate Manufacturer=None, Manufacturer="Texas Instruments", ComponentLink1Description="Datasheet Link", ComponentLink1URL=http://www.ti.com/lit/ds/symlink/sn74avc8t245.pdf, CompType=IC, LatestRevisionDate=2014-03-31, MountType=SMT, PackageReference=PW0024A, PartNumber=SN74AVC8T245PW, Publisher="Texas Instruments", RoHS=Y, SymbolCreator=a0411947, SymbolVersion=2014-02-27, U/M=EA
U3: library part CMP-0244-00109-1, "Fixed Low Drop Positive Voltage Regulator, 5V, 3-Pin DPAK, Tape and Reel", ComponentLink1Description="Manufacturer URL", ComponentLink1URL=http://www.st.com, ComponentLink2Description=Datasheet, ComponentLink2URL=http://www.st.com/internet/com/TECHNICAL_RESOURCES/TECHNICAL_LITERATURE/DATASHEET/CD00000544.pdf, DatasheetVersion=1/11/2011, PackageDescription="3-Pin Transistor Outline Package 2.28 mm Pitch, 9.7 mm Lead Span (DPAK)", PackageReference=TO-252, PackageVersion=2011
U4: library part CMP-0244-00088-1, "Fixed Low Drop Positive Voltage Regulator, 3.3V, 3-Pin DPAK, Tape and Reel", ComponentLink1Description="Manufacturer URL", ComponentLink1URL=http://www.st.com, ComponentLink2Description=Datasheet, ComponentLink2URL=http://www.st.com/internet/com/TECHNICAL_RESOURCES/TECHNICAL_LITERATURE/DATASHEET/CD00000544.pdf, DatasheetVersion=1/11/2011, PackageDescription="3-Pin Transistor Outline Package 2.28 mm Pitch, 9.7 mm Lead Span (DPAK)", PackageReference=TO-252, PackageVersion=2011

## Nets (pads, with @x,y where several pads share a name; then routed paths per layer and width w, separated by ;. In a path a pad name is that pad's centre, name@x,y a point inside that pad or via, vN(x,y) a via of type N, cw(c..) or ccw(c..) an arc to the next point about the centre after c; other vN are vias at no path point)
!OE: P4.2 R7.2 R18.1 U2_LS0.22 U2_LS1.22 U2_LS2.22 U2_LS3.22 U2_LS4.22 U2_LS5.22 U2_LS6.22 U2_LS7.22
CHIP_IO_0: J6.2 JP2.1 U2_LS0.21
CHIP_IO_1: J6.4 JP2.2 U2_LS0.20
CHIP_IO_2: J6.6 JP2.3 U2_LS0.19
CHIP_IO_3: J6.8 JP2.4 U2_LS0.18
CHIP_IO_4: J6.10 JP2.5 U2_LS0.17
CHIP_IO_5: J6.12 JP2.6 U2_LS0.16
CHIP_IO_6: J6.14 JP2.7 U2_LS0.15
CHIP_IO_7: J6.16 JP2.8 U2_LS0.14
CHIP_IO_8: J7.2 JP2.9 U2_LS1.21
CHIP_IO_9: J7.4 JP2.10 U2_LS1.20
CHIP_IO_10: J7.6 JP2.11 U2_LS1.19
CHIP_IO_11: J7.8 JP2.12 U2_LS1.18
CHIP_IO_12: J7.10 JP2.13 U2_LS1.17
CHIP_IO_13: J7.12 JP2.14 U2_LS1.16
CHIP_IO_14: J7.14 JP2.15 U2_LS1.15
CHIP_IO_15: J7.16 JP2.16 U2_LS1.14
CHIP_IO_16: J8.2 JP4.1 U2_LS2.21
CHIP_IO_17: J8.4 JP4.2 U2_LS2.20
CHIP_IO_18: J8.6 JP4.3 U2_LS2.19
CHIP_IO_19: J8.8 JP4.4 U2_LS2.18
CHIP_IO_20: J8.10 JP4.5 U2_LS2.17
CHIP_IO_21: J8.12 JP4.6 U2_LS2.16
CHIP_IO_22: J8.14 JP4.7 U2_LS2.15
CHIP_IO_23: J8.16 JP4.8 U2_LS2.14
CHIP_IO_24: J9.2 JP4.9 U2_LS3.21
CHIP_IO_25: J9.4 JP4.10 U2_LS3.20
CHIP_IO_26: J9.6 JP4.11 U2_LS3.19
CHIP_IO_27: J9.8 JP4.12 U2_LS3.18
CHIP_IO_28: J9.10 JP4.13 U2_LS3.17
CHIP_IO_29: J9.12 JP4.14 U2_LS3.16
CHIP_IO_30: J9.14 JP4.15 U2_LS3.15
CHIP_IO_31: J9.16 JP4.16 U2_LS3.14
CHIP_IO_32: J10.2 JP6.1 U2_LS4.21
CHIP_IO_33: J10.4 JP6.2 U2_LS4.20
CHIP_IO_34: J10.6 JP6.3 U2_LS4.19
CHIP_IO_35: J10.8 JP6.4 U2_LS4.18
CHIP_IO_36: J10.10 JP6.5 U2_LS4.17
CHIP_IO_37: J10.12 JP6.6 U2_LS4.16
CHIP_IO_38: J10.14 JP6.7 U2_LS4.15
CHIP_IO_39: J10.16 JP6.8 U2_LS4.14
CHIP_IO_40: J11.2 JP6.9 U2_LS5.21
CHIP_IO_41: J11.4 JP6.10 U2_LS5.20
CHIP_IO_42: J11.6 JP6.11 U2_LS5.19
CHIP_IO_43: J11.8 JP6.12 U2_LS5.18
CHIP_IO_44: J11.10 JP6.13 U2_LS5.17
CHIP_IO_45: J11.12 JP6.14 U2_LS5.16
CHIP_IO_46: J11.14 JP6.15 U2_LS5.15
CHIP_IO_47: J11.16 JP6.16 U2_LS5.14
CHIP_IO_48: J12.2 JP8.1 U2_LS6.21
CHIP_IO_49: J12.4 JP8.2 U2_LS6.20
CHIP_IO_50: J12.6 JP8.3 U2_LS6.19
CHIP_IO_51: J12.8 JP8.4 U2_LS6.18
CHIP_IO_52: J12.10 JP8.5 U2_LS6.17
CHIP_IO_53: J12.12 JP8.6 U2_LS6.16
CHIP_IO_54: J12.14 JP8.7 U2_LS6.15
CHIP_IO_55: J12.16 JP8.8 U2_LS6.14
CHIP_IO_56: J13.2 JP8.9 U2_LS7.21
CHIP_IO_57: J13.4 JP8.10 U2_LS7.20
CHIP_IO_58: J13.6 JP8.11 U2_LS7.19
CHIP_IO_59: J13.8 JP8.12 U2_LS7.18
CHIP_IO_60: J13.10 JP8.13 U2_LS7.17
CHIP_IO_61: J13.12 JP8.14 U2_LS7.16
CHIP_IO_62: J13.14 JP8.15 U2_LS7.15
CHIP_IO_63: J13.16 JP8.16 U2_LS7.14
EN: R2.1 R5.2 U1.5
FB: R3.1 R4.2 R6.2 U1.3
FPGA_IO_0: JP1.1 M1.Y15 U2_LS0.3
FPGA_IO_1: JP1.2 M1.Y16 U2_LS0.4
FPGA_IO_2: JP1.3 M1.Y17 U2_LS0.5
FPGA_IO_3: JP1.4 M1.Y18 U2_LS0.6
FPGA_IO_4: JP1.5 M1.Y21 U2_LS0.7
FPGA_IO_5: JP1.6 M1.Y22 U2_LS0.8
FPGA_IO_6: JP1.7 M1.Y23 U2_LS0.9
FPGA_IO_7: JP1.8 M1.Y24 U2_LS0.10
FPGA_IO_8: JP1.9 M1.Y25 U2_LS1.3
FPGA_IO_9: JP1.10 M1.Y26 U2_LS1.4
FPGA_IO_10: JP1.11 M1.Y27 U2_LS1.5
FPGA_IO_11: JP1.12 M1.Y28 U2_LS1.6
FPGA_IO_12: JP1.13 M1.Y29 U2_LS1.7
FPGA_IO_13: JP1.14 M1.Y30 U2_LS1.8
FPGA_IO_14: JP1.15 M1.Y33 U2_LS1.9
FPGA_IO_15: JP1.16 M1.Y34 U2_LS1.10
FPGA_IO_16: JP3.1 M1.Y35 U2_LS2.3
FPGA_IO_17: JP3.2 M1.Y36 U2_LS2.4
FPGA_IO_18: JP3.3 M1.Y37 U2_LS2.5
FPGA_IO_19: JP3.4 M1.Y38 U2_LS2.6
FPGA_IO_20: JP3.5 M1.Y39 U2_LS2.7
FPGA_IO_21: JP3.6 M1.Y40 U2_LS2.8
FPGA_IO_22: JP3.7 M1.Y43 U2_LS2.9
FPGA_IO_23: JP3.8 M1.Y44 U2_LS2.10
FPGA_IO_24: JP3.9 M1.Y45 U2_LS3.3
FPGA_IO_25: JP3.10 M1.Y46 U2_LS3.4
FPGA_IO_26: JP3.11 M1.Y47 U2_LS3.5
FPGA_IO_27: JP3.12 M1.Y48 U2_LS3.6
FPGA_IO_28: JP3.13 M1.X3 U2_LS3.7
FPGA_IO_29: JP3.14 M1.X4 U2_LS3.8
FPGA_IO_30: JP3.15 M1.X5 U2_LS3.9
FPGA_IO_31: JP3.16 M1.X6 U2_LS3.10
FPGA_IO_32: JP5.1 M1.X7 U2_LS4.3
FPGA_IO_33: JP5.2 M1.X8 U2_LS4.4
FPGA_IO_34: JP5.3 M1.X11 U2_LS4.5
FPGA_IO_35: JP5.4 M1.X12 U2_LS4.6
FPGA_IO_36: JP5.5 M1.X13 U2_LS4.7
FPGA_IO_37: JP5.6 M1.X14 U2_LS4.8
FPGA_IO_38: JP5.7 M1.X15 U2_LS4.9
FPGA_IO_39: JP5.8 M1.X16 U2_LS4.10
FPGA_IO_40: JP5.9 M1.X17 U2_LS5.3
FPGA_IO_41: JP5.10 M1.X18 U2_LS5.4
FPGA_IO_42: JP5.11 M1.X21 U2_LS5.5
FPGA_IO_43: JP5.12 M1.X22 U2_LS5.6
FPGA_IO_44: JP5.13 M1.X23 U2_LS5.7
FPGA_IO_45: JP5.14 M1.X24 U2_LS5.8
FPGA_IO_46: JP5.15 M1.X25 U2_LS5.9
FPGA_IO_47: JP5.16 M1.X26 U2_LS5.10
FPGA_IO_48: JP7.1 M1.X27 U2_LS6.3
FPGA_IO_49: JP7.2 M1.X28 U2_LS6.4
FPGA_IO_50: JP7.3 M1.X29 U2_LS6.5
FPGA_IO_51: JP7.4 M1.X30 U2_LS6.6
FPGA_IO_52: JP7.5 M1.X33 U2_LS6.7
FPGA_IO_53: JP7.6 M1.X34 U2_LS6.8
FPGA_IO_54: JP7.7 M1.X35 U2_LS6.9
FPGA_IO_55: JP7.8 M1.X36 U2_LS6.10
FPGA_IO_56: JP7.9 M1.X37 U2_LS7.3
FPGA_IO_57: JP7.10 M1.X38 U2_LS7.4
FPGA_IO_58: JP7.11 M1.X39 U2_LS7.5
FPGA_IO_59: JP7.12 M1.X40 U2_LS7.6
FPGA_IO_60: JP7.13 M1.X43 U2_LS7.7
FPGA_IO_61: JP7.14 M1.X44 U2_LS7.8
FPGA_IO_62: JP7.15 M1.X45 U2_LS7.9
FPGA_IO_63: JP7.16 M1.X46 U2_LS7.10
FPGA_IO_64: M1.X47
FPGA_IO_65: M1.X48
FPGA_IO_!OE: M1.Z4 P4.1
GND: C1.2 C2.2 C3.2 C4.2 C5.2 C6_LS0.2 C6_LS1.2 C6_LS2.2 C6_LS3.2 C6_LS4.2 C6_LS5.2 C6_LS6.2 C6_LS7.2 C7_LS0.2 C7_LS1.2 C7_LS2.2 C7_LS3.2 C7_LS4.2 C7_LS5.2 C7_LS6.2 C7_LS7.2 C8_LS0.2 C8_LS1.2 C8_LS2.2 C8_LS3.2 C8_LS4.2 C8_LS5.2 C8_LS6.2 C8_LS7.2 C9_LS0.2 C9_LS1.2 C9_LS2.2 C9_LS3.2 C9_LS4.2 C9_LS5.2 C9_LS6.2 C9_LS7.2 C10.2 C11.2 C12.2 C13.2 C14.2 C15.2 C16.2 C17.2 C18.2 C19.2 C20.2 C21.2 C22.2 DS2.2 J3.1 J4.1 J6.1 J6.3 J6.5 J6.7 J6.9 J6.11 J6.13 J6.15 J7.1 J7.3 J7.5 J7.7 J7.9 J7.11 J7.13 J7.15 J8.1 J8.3 J8.5 J8.7 J8.9 J8.11 J8.13 J8.15 J9.1 J9.3 J9.5 J9.7 J9.9 J9.11 J9.13 J9.15 J10.1 J10.3 J10.5 J10.7 J10.9 J10.11 J10.13 J10.15 J11.1 J11.3 J11.5 J11.7 J11.9 J11.11 J11.13 J11.15 J12.1 J12.3 J12.5 J12.7 J12.9 J12.11 J12.13 J12.15 J13.1 J13.3 J13.5 J13.7 J13.9 J13.11 J13.13 J13.15 M1.X1 M1.X2 M1.X19 M1.X20 M1.X31 M1.X32 M1.X49 M1.X50 M1.Y1 M1.Y2 M1.Y19 M1.Y20 M1.Y31 M1.Y32 M1.Y49 M1.Y50 M1.Z19 M1.Z20 P2.1 PCBA1.3 PCBA1.4 PCBA1.6 Q1.2 Q2.2 R4.1 R5.1 R6.1 R8_LS0.2 R8_LS1.2 R8_LS2.2 R8_LS3.2 R8_LS4.2 R8_LS5.2 R8_LS6.2 R8_LS7.2 R9.2 R10.2 R11.2 R12.2 R13.2 R14.2 R18.2 U1.4 U1.9 U2_LS0.11 U2_LS0.12 U2_LS0.13 U2_LS1.11 U2_LS1.12 U2_LS1.13 U2_LS2.11 U2_LS2.12 U2_LS2.13 U2_LS3.11 U2_LS3.12 U2_LS3.13 U2_LS4.11 U2_LS4.12 U2_LS4.13 U2_LS5.11 U2_LS5.12 U2_LS5.13 U2_LS6.11 U2_LS6.12 U2_LS6.13 U2_LS7.11 U2_LS7.12 U2_LS7.13 U3.1 U4.1
LV_DIR_0: M1.Y5 R8_LS0.1 R19_LS0.2 U2_LS0.2
LV_DIR_1: M1.Y6 R8_LS1.1 R19_LS1.2 U2_LS1.2
LV_DIR_2: M1.Y7 R8_LS2.1 R19_LS2.2 U2_LS2.2
LV_DIR_3: M1.Y8 R8_LS3.1 R19_LS3.2 U2_LS3.2
LV_DIR_4: M1.Y11 R8_LS4.1 R19_LS4.2 U2_LS4.2
LV_DIR_5: M1.Y12 R8_LS5.1 R19_LS5.2 U2_LS5.2
LV_DIR_6: M1.Y13 R8_LS6.1 R19_LS6.2 U2_LS6.2
LV_DIR_7: M1.Y14 R8_LS7.1 R19_LS7.2 U2_LS7.2
NetC11_1: C11.1 C12.1 P1.1 U3.4
NetC15_1: C15.1 C16.1 P3.1 U4.4
NetDS1_1: DS1.1 R15.1
NetDS1_2: DS1.2 Q1.3
NetDS2_1: DS2.1 R16.1
NetDS3_1: DS3.1 R17.1
NetDS3_2: DS3.2 Q2.3
NR: C5.1 U1.6
PAD1: C10.1 MH1.PAD R9.1
PAD2: C13.1 MH2.PAD R10.1
PAD3: C14.1 MH3.PAD R11.1
PAD4: C17.1 MH4.PAD R12.1
PAD5: C18.1 MH5.PAD R13.1
PAD6: C19.1 MH6.PAD R14.1
PP_P5V0_PLL: P1.2 PCBA1.1 PCBA1.2 Q2.1
SHUNT: R1.1 TP1.1 U1.1 U1.2
V_OUT: C2.1 C3.1 C4.1 C8_LS0.1 C8_LS1.1 C8_LS2.1 C8_LS3.1 C8_LS4.1 C8_LS5.1 C8_LS6.1 C8_LS7.1 C9_LS0.1 C9_LS1.1 C9_LS2.1 C9_LS3.1 C9_LS4.1 C9_LS5.1 C9_LS6.1 C9_LS7.1 Q1.1 R1.2 R3.2 R4.3 TP2.1 U2_LS0.23 U2_LS0.24 U2_LS1.23 U2_LS1.24 U2_LS2.23 U2_LS2.24 U2_LS3.23 U2_LS3.24 U2_LS4.23 U2_LS4.24 U2_LS5.23 U2_LS5.24 U2_LS6.23 U2_LS6.24 U2_LS7.23 U2_LS7.24
VCCA_LS0: C1.1 C6_LS0.1 C6_LS1.1 C6_LS2.1 C6_LS3.1 C6_LS4.1 C6_LS5.1 C6_LS6.1 C6_LS7.1 C7_LS0.1 C7_LS1.1 C7_LS2.1 C7_LS3.1 C7_LS4.1 C7_LS5.1 C7_LS6.1 C7_LS7.1 M1.X9 M1.X10 M1.X41 M1.X42 M1.Y9 M1.Y10 M1.Y41 M1.Y42 M1.Z1 M1.Z2 P3.2 R2.2 R7.1 R15.2 R16.2 R17.2 U1.7 U1.8 U2_LS0.1 U2_LS1.1 U2_LS2.1 U2_LS3.1 U2_LS4.1 U2_LS5.1 U2_LS6.1 U2_LS7.1
VIN_UNREG: C20.1 C21.1 C22.1 J1.1 J2.1 P2.2 U3.3 U4.3
pads on no net: M1.0 M1.Y3 M1.Y4 M1.Z3 M1.Z5 M1.Z6 M1.Z7 M1.Z8 M1.Z9 M1.Z10 M1.Z11 M1.Z12 M1.Z13 M1.Z14 M1.Z15 M1.Z16 M1.Z17 M1.Z18 PCBA1.5 PCBA1.7 PCBA1.8 PCBA1.9 PCBA1.10 PCBA1.MH1 PCBA1.MH2 PCBA1.MH3 PCBA1.MH4 R19_LS0.1 R19_LS1.1 R19_LS2.1 R19_LS3.1 R19_LS4.1 R19_LS5.1 R19_LS6.1 R19_LS7.1

## Polygon pours and split planes (outlines as drawn)
GND on MidLayer 1 "GND_MID1" (solid, pour order 0): 0,300 0,7200 10900,7200 10900,300

## Text inside footprints (layer, text, board x,y; h text height)
J6: Top Overlay "1" at 10257.68,5130.12 h40 r180; Top Overlay "2" at 10273.43,5059.25 h40 r180; Top Overlay "16" at 9804.13,5059.25 h40 r180; Top Overlay "15" at 9804.13,5130.12 h40 r180
J7: Top Overlay "1" at 10257.68,4730.12 h40 r180; Top Overlay "2" at 10273.43,4659.25 h40 r180; Top Overlay "16" at 9804.13,4659.25 h40 r180; Top Overlay "15" at 9804.13,4730.12 h40 r180
J8: Top Overlay "1" at 10257.68,4380.12 h40 r180; Top Overlay "2" at 10273.43,4309.25 h40 r180; Top Overlay "16" at 9804.13,4309.25 h40 r180; Top Overlay "15" at 9804.13,4380.12 h40 r180
J9: Top Overlay "1" at 10257.68,4030.12 h40 r180; Top Overlay "2" at 10273.43,3959.25 h40 r180; Top Overlay "16" at 9804.13,3959.25 h40 r180; Top Overlay "15" at 9804.13,4030.12 h40 r180
J10: Top Overlay "1" at 10257.68,3630.12 h40 r180; Top Overlay "2" at 10273.43,3559.25 h40 r180; Top Overlay "16" at 9804.13,3559.25 h40 r180; Top Overlay "15" at 9804.13,3630.12 h40 r180
J11: Top Overlay "1" at 10257.68,3280.12 h40 r180; Top Overlay "2" at 10273.43,3209.25 h40 r180; Top Overlay "16" at 9804.13,3209.25 h40 r180; Top Overlay "15" at 9804.13,3280.12 h40 r180
J12: Top Overlay "1" at 10257.68,2880.12 h40 r180; Top Overlay "2" at 10273.43,2809.25 h40 r180; Top Overlay "16" at 9804.13,2809.25 h40 r180; Top Overlay "15" at 9804.13,2880.12 h40 r180
J13: Top Overlay "1" at 10257.68,2280.12 h40 r180; Top Overlay "2" at 10273.43,2209.25 h40 r180; Top Overlay "16" at 9804.13,2209.25 h40 r180; Top Overlay "15" at 9804.13,2280.12 h40 r180
M1: Top Overlay "ZBUS" at 5875,4175 h50; Top Overlay "1" at 5700,4175 h50; Top Overlay "2" at 5325,4875 h50 r90; Top Overlay "1" at 6725,4875 h50 r90; Top Overlay "YBUS" at 5325,4575 h50 r90; Top Overlay "XBUS" at 6725,4575 h50 r90